# Altium PCB ESC.PcbDoc
Units mil, origin at the board's own origin, x right, y up, seen from the top; angles counter-clockwise.
Board outline 1770 x 2190 mil, 2 copper layers (Top Layer, Bottom Layer); 93 components, 68 nets, 363 pads, 118 vias.
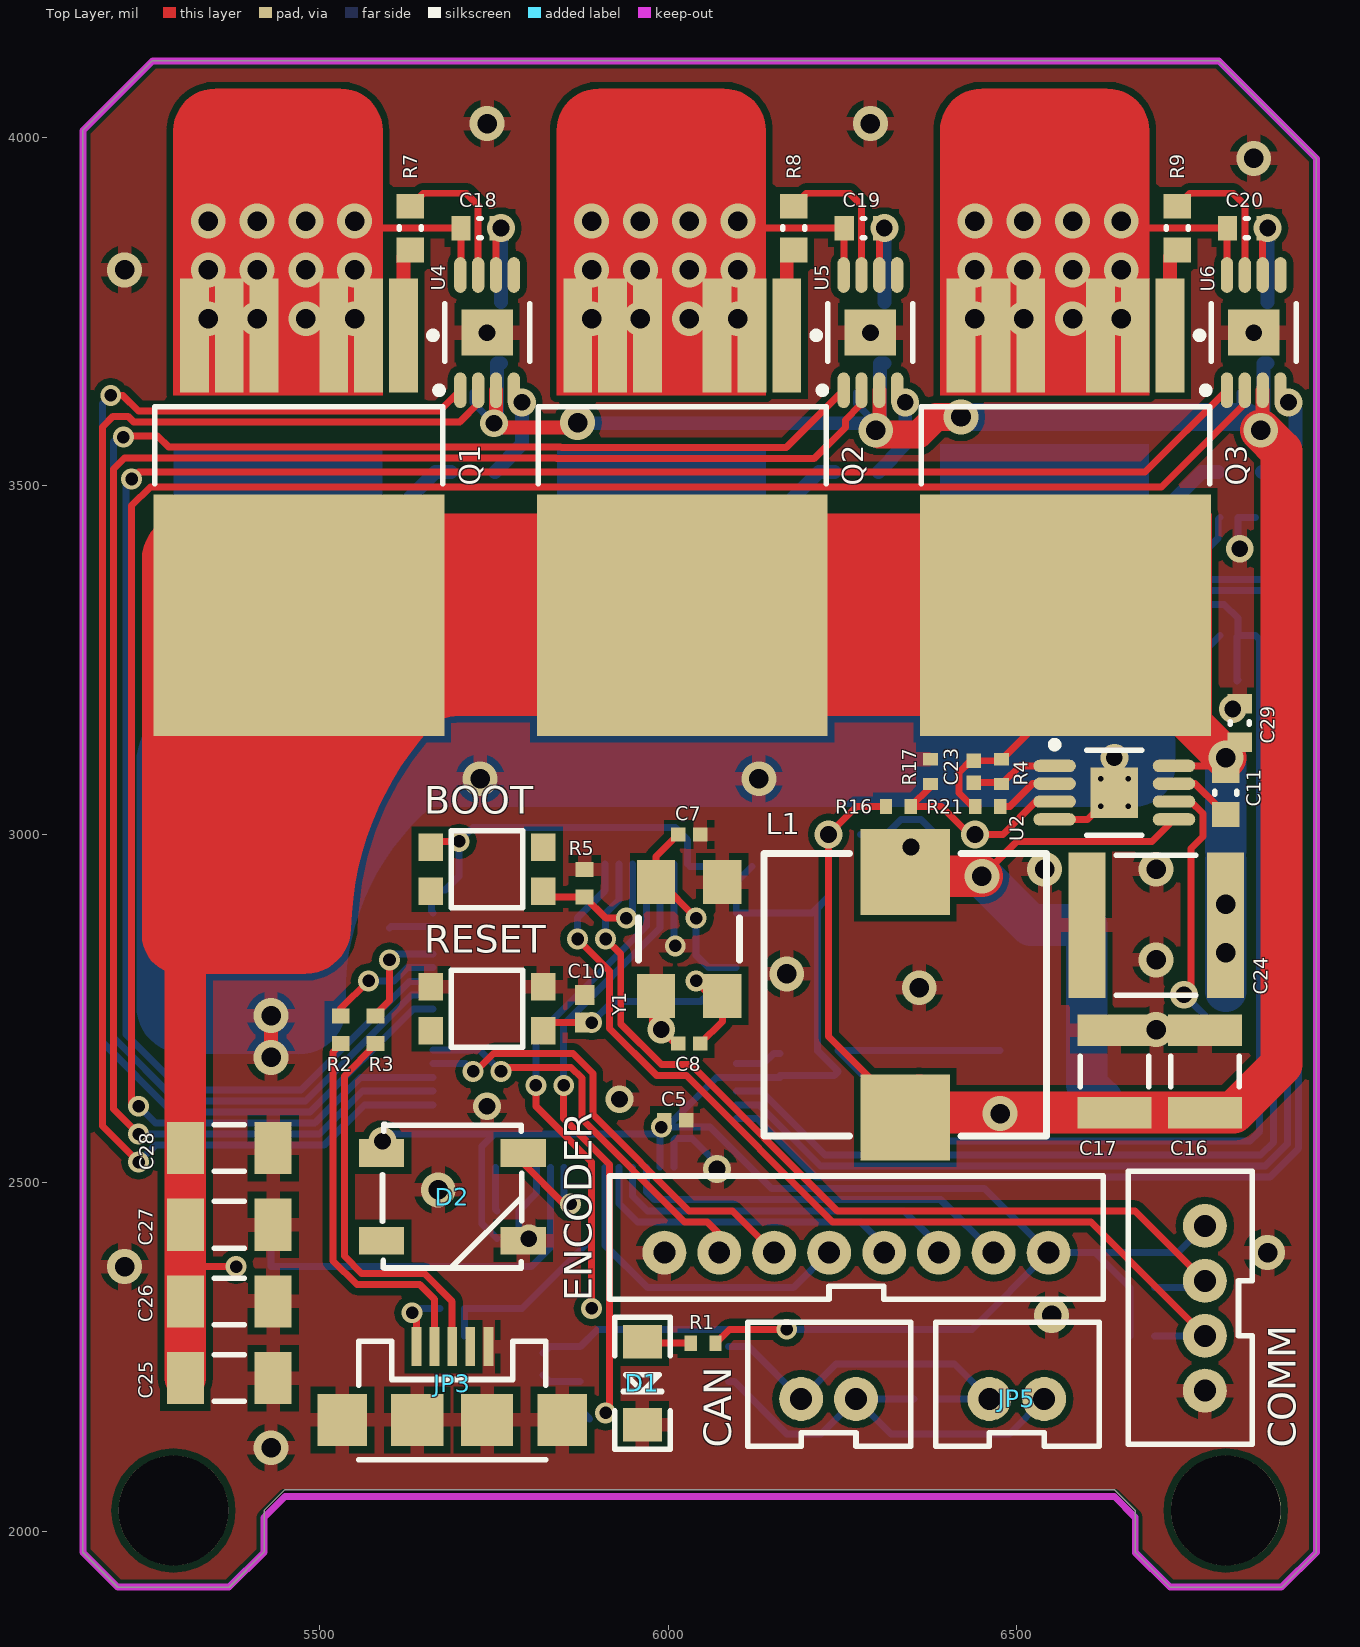
[diagram p0: Top Layer view]
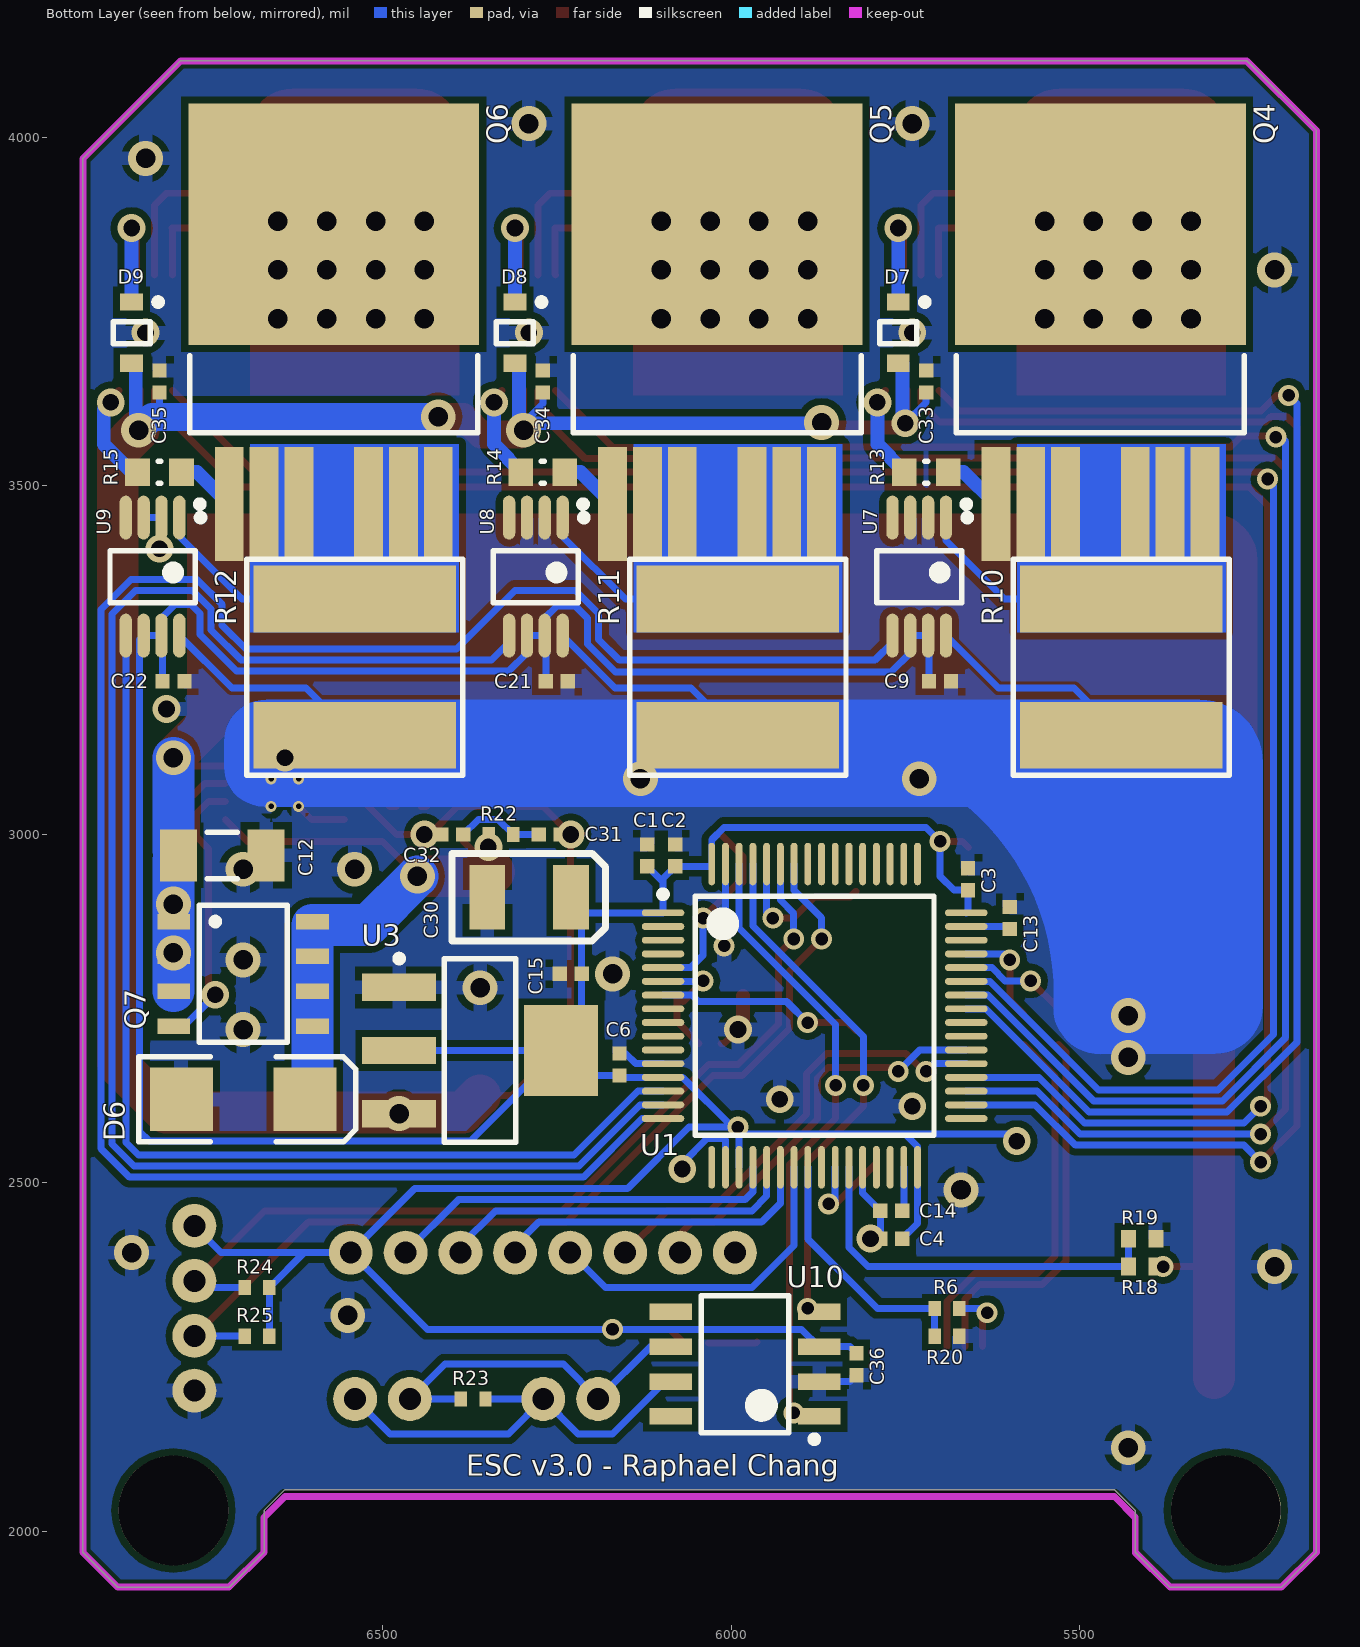
[diagram p1: Bottom Layer view, seen from below]

## Layer stack, top to bottom
Top Solder: solder mask 0.4, Solder Resist, Dk 3.5
Top Layer: signal copper 1.4
Dielectric 1: dielectric 12.6, FR-4, Dk 4.8
Bottom Layer: signal copper 1.4
Bottom Solder: solder mask 0.4, Solder Resist, Dk 3.5

## Board outline
5160,1970 5210,1920 5370,1920 5420,1970 5420,2030 5450,2060 6640,2060 6670,2030 6670,1970 6720,1920 6880,1920 6930,1970 6930,3970 6790,4110 5260,4110 5160,4010

## Design rules (kind name [scope] priority, off if disabled: settings)
Clearance Clearance_2 [All vs OnLayer('Keep-Out Layer')] p1: gap=5.91
Clearance Clearance_1 [InPolygon] p2: gap=9.84
Clearance [All] p3: gap=5.91
ComponentClearance [All] p1: gap=10 collisioncheckmode=3 verticalgap=0 showdistances=FALSE
PolygonConnect [All] p1: connectstyle=Relief reliefconductorwidth=20 reliefentries=4 polygonreliefangle="90 Angle" airgapwidth=10
RoutingVias [All] p1: holewidth=28 width=50 viastyle="Through Hole" minholewidth=24 minwidth=40 maxholewidth=28 maxwidth=50
ShortCircuit ShortCircuit_1 [All vs OnLayer('Keep-Out Layer')] p1: allowed=TRUE
ShortCircuit [All] p2: allowed=FALSE
SolderMaskExpansion [All] p1: expansion=4
Width [All] p1: maxlimit=60 minlimit=10 preferedwidth=10
28 further rules are at their usual default settings.

## Classes and differential pairs
component class U_Power: C11 C12 C15 C16 C17 C18 C19 C20 C23 C24 C25 C26 C27 C28 C29 C30 C31 C32 C33 C34 C35 D6 D7 D8 D9 L1 Q1 Q2 Q3 Q4 Q5 Q6 Q7 R4 R7 R8 R9 R10 R11 R12 R13 R14 R15 R16 R17 R21 R22 U2 U3 U4 U5 U6
component class U_MCU: BOOT C1 C2 C3 C4 C5 C6 C7 C8 C9 C10 C13 C14 C21 C22 C36 D1 D2 R1 R2 R3 R5 R6 R18 R19 R20 R23 R24 R25 RESET U1 U7 U8 U9 U10 Y1
component class ESC: CAN JP1 JP2 JP3 JP5

## Components (designator, comment, footprint, x,y, rotation, side; value= is the part's Value field where it differs from the comment)
BOOT "" SWITCH 5740,2950 r180 top (schematic designator SW1)
C1 "2.2uF" CAPC0402(1005)60_L 6120,2970 r270 bottom
C2 "2.2uF" CAPC0402(1005)60_L 6080,2970 r270 bottom
C3 "2.2uF" CAPC0402(1005)60_L 5660,2935.75 r270 bottom
C4 "2.2uF" CAPC0402(1005)60_L 5770,2420 r180 bottom
C5 "2.2uF" CAPC0402(1005)60_L 6010,2590 r180 top
C6 "4.7uF" CAPC0402(1005)60_L 6160,2670 r270 bottom
C7 "15pF" CAPC0402(1005)60_L 6030,3000 r0 top
C8 "15pF" CAPC0402(1005)60_L 6030,2700 r180 top
C9 "0.1uF" CAPC0402(1005)60_L 5700,3220 r180 bottom
C10 "100nF" CAPC0402(1005)60_M 5880,2750 r270 top
C11 "0.47uF" CAPC0603(1608)100_N 6800,3060 r90 top
C12 "10uF" CAPC1206(3216)190_M 6730,2970 r0 bottom
C13 "2.2uF" CAPC0402(1005)60_L 5600,2880 r270 bottom
C14 "2.2uF" CAPC0402(1005)60_L 5770,2460 r180 bottom
C15 "10uF" CAPC0402(1005)60_L 6230,2800 r180 bottom
C16 "47uF" CAPC1210(3225)280_N 6770,2660 r270 top
C17 "47uF" CAPC1210(3225)280_N 6640,2660 r270 top
C18 "0.22uF" CAPC0603(1608)100_L 5730,3870 r0 top
C19 "0.22uF" CAPC0603(1608)100_L 6280,3870 r0 top
C20 "0.22uF" CAPC0603(1608)100_L 6830,3870 r0 top
C21 "0.1uF" CAPC0402(1005)60_L 6250,3220 r180 bottom
C22 "0.1uF" CAPC0402(1005)60_L 6800,3220 r180 bottom
C23 "1nF" CAPC0402(1005)60_L 6438.36,3090 r270 top
C24 "22uF" CAPC2220(5750)230_L 6700,2870 r0 top
C25 "10uF" CAPC1206(3216)190_M 5370,2220 r180 top
C26 "10uF" CAPC1206(3216)190_M 5370,2330 r180 top
C27 "10uF" CAPC1206(3216)190_M 5370,2440 r180 top
C28 "10uF" CAPC1206(3216)190_M 5370,2550 r180 top
C29 "1uF" CAPC0603(1608)100_L 6820,3160 r270 top
C30 "100uF" AVX-CAPC7343_V 6290,2910 r0 bottom
C31 "10nF" CAPC0402(1005)60_L 6260,3000 r180 bottom
C32 "0.1uF" CAPC0402(1005)60_L 6400,3000 r180 bottom
C33 "1uF" CAPC0402(1005)60_L 5720,3650 r270 bottom
C34 "1uF" CAPC0402(1005)60_L 6270,3650 r270 bottom
C35 "1uF" CAPC0402(1005)60_L 6820,3650 r270 bottom
C36 "0.1uF" CAPC0402(1005)60_L 5820,2240 r90 bottom
CAN "" JST-2-PTH-VERT 6230,2190 r0 top (schematic designator JP4)
COMM "" JST-4-PTH-VERT 6770,2320 r90 top (schematic designator JP1)
D1 "LED-BLUE" LED-1206 5962.8,2212.8 r270 top
D2 "WS2812B" WS2812B 5690,2480 r0 top
D6 "" SMB 6700,2620 r180 bottom
D7 "" ONSC-SOD-323-2-477-02_V 5760,3720 r270 bottom
D8 "" ONSC-SOD-323-2-477-02_V 6310,3720 r270 bottom
D9 "" ONSC-SOD-323-2-477-02_V 6860,3720 r270 bottom
ENCODER "Encoder" JST-8-PTH-VERT 6270,2400 r0 top (schematic designator JP2)
JP3 "USB" USB-MICROB 5690,2160 r0 top
JP5 "" JST-2-PTH-VERT 6500,2190 r0 top
L1 "SDR0805-180ML" IHLP-4040DZ-51 6340,2770 r270 top
Q1 "IRFS7530" DPAK127P1525X483-7N 5470,3470 r270 top
Q2 "IRFS7530" DPAK127P1525X483-7N 6020,3470 r270 top
Q3 "IRFS7530" DPAK127P1525X483-7N 6570,3470 r270 top
Q4 "IRFS7530" DPAK127P1525X483-7N 5470,3720 r90 bottom
Q5 "IRFS7530" DPAK127P1525X483-7N 6020,3720 r90 bottom
Q6 "IRFS7530" DPAK127P1525X483-7N 6570,3720 r90 bottom
Q7 "MOSFET-P" SOIC127P600X175-8N 6700,2800 r180 bottom
R1 "10R" RESC0402(1005)_L 6050,2270 r0 top
R2 "22R" RESC0402(1005)_M 5530,2720 r90 top
R3 "22R" RESC0402(1005)_M 5580,2720 r90 top
R4 "10K" RESC0402(1005)_L 6478.36,3090 r90 top
R5 "10K" RESC0402(1005)_N 5880,2930 r270 top
R6 "4K7" RESC0402(1005)_L 5690,2320 r180 bottom
R7 "4R7" RESC0603(1608)_N 5630,3870 r90 top
R8 "4R7" RESC0603(1608)_N 6180,3870 r90 top
R9 "4R7" RESC0603(1608)_N 6730,3870 r90 top
R10 "" Shunt 5440,3240 r90 bottom
R11 "" Shunt 5990,3240 r90 bottom
R12 "" Shunt 6540,3240 r90 bottom
R13 "4R7" RESC0603(1608)_N 5720,3520 r0 bottom
R14 "4R7" RESC0603(1608)_N 6270,3520 r0 bottom
R15 "4R7" RESC0603(1608)_N 6820,3520 r0 bottom
R16 "36K" RESC0402(1005)_L 6330,3040 r180 top
R17 "3K9" RESC0402(1005)_L 6376.07,3090 r270 top
R18 "200K" RESC0402(1005)_N 5410,2380 r0 bottom
R19 "10K" RESC0402(1005)_N 5410,2420 r0 bottom
R20 "9K1" RESC0402(1005)_L 5690,2280 r0 bottom
R21 "200K" RESC0402(1005)_L 6458.36,3040 r0 top
R22 "154K" RESC0402(1005)_L 6330,3000 r180 bottom
R23 "120R" RESC0402(1005)_L 6370,2190 r180 bottom
R24 "4K7" RESC0402(1005)_L 6680,2280 r180 bottom
R25 "4K7" RESC0402(1005)_L 6680,2350 r180 bottom
RESET "" SWITCH 5740,2750 r180 top (schematic designator SW2)
U1 "STM32F405RGT7TR" STM-LQFP64_L 5880,2740 r180 bottom
U2 "LM5085QMY/NOPB" MUY08A_N 6640,3060 r0 top
U3 "LD1117AS33TR" SOT-223_M 6360,2690 r180 bottom
U4 "LTC4444" LT-MS8E-8-EDP_L 5740,3720 r90 top
U5 "LTC4444" LT-MS8E-8-EDP_L 6290,3720 r90 top
U6 "LTC4444" LT-MS8E-8-EDP_L 6840,3720 r90 top
U7 "AD8418" MSOP-8 5730,3370 r270 bottom
U8 "AD8418" MSOP-8 6280,3370 r270 bottom
U9 "AD8418" MSOP-8 6830,3370 r270 bottom
U10 "TCAN332" SOIC8 5980,2240 r0 bottom
Y1 "" ABRA-ABM3B-4_V 6030,2850 r270 top

## Footprints (in the part's own frame and the unit in brackets; to place one, negate y for a bottom-side part, rotate by r counter-clockwise, add the part's x,y. Pads: shape width x height; smd on the part's side, far side on the other; paste and mask are expansions set on the pad)
ABRA-ABM3B-4_V [mil] "SMT Crystal, 4-Leads, Body 5.2x3.4mm"
  rect 63x55 smd: 1(-81.5,-47.5) 2(-81.5,47.5) 2(81.5,-47.5) 3(81.5,47.5)
  silkscreen extent -31,-72 31,72, body extent -114,-52 113,51, height 39
AVX-CAPC7343_V [mm] "SMT Capacitor, 2 Leads, Body 7.3x4.3mm"
  rect 1.3x2.35 smd: 1(-1.535,0.001) 2(1.515,0.001)
  silkscreen extent -2.8,-1.6 2.8,1.6, body extent -2.1,-1.1 2.1,1.1, height 1.9
CAPC0402(1005)60_L [mm] "Chip Capacitor, Body 1.0x0.5mm, Height 0.6mm, IPC High Density"
  rect 0.52x0.52 smd: 1(-0.4,0) 2(0.4,0)
  body extent -0.55,-0.3 0.55,0.3, height 0.6
CAPC0402(1005)60_M [mm] "Chip Capacitor, Body 1.0x0.5mm, Height 0.6mm, IPC Low Density"
  rect 0.72x0.72 smd: 1(-0.5,0) 2(0.5,0)
  body extent -0.55,-0.3 0.55,0.3, height 0.6
CAPC0603(1608)100_L [mm] "Chip Capacitor, Body 1.6x0.8mm, Height 1.0mm, IPC High Density"
  rect 0.7x0.9 smd: 1(-0.7,0) 2(0.7,0)
  silkscreen extent -0.05,-0.35 0.05,0.35, body extent -0.87,-0.47 0.88,0.48, height 1
CAPC0603(1608)100_N [mm] "Chip Capacitor, Body 1.6x0.8mm, Height 1.0mm, IPC Medium Density"
  rect 0.9x1 smd: 1(-0.8,0) 2(0.8,0)
  silkscreen extent -0.05,-0.4 0.05,0.4, body extent -0.87,-0.48 0.88,0.47, height 1
CAPC1206(3216)190_M [mm] "Chip Capacitor, Body 3.2x1.6mm, Height 1.9mm, IPC Low Density"
  rect 1.35x1.9 smd: 1(-1.6,0) 2(1.6,0)
  silkscreen extent -0.55,-0.85 0.55,0.85, body extent -1.7,-0.9 1.7,0.9, height 1.9
CAPC1210(3225)280_N [mm] "Chip Capacitor, Body 3.2x2.5mm, Height 2.8mm, IPC Medium Density"
  rect 1.15x2.7 smd: 1(-1.5,0) 2(1.5,0)
  silkscreen extent -0.55,-1.25 0.55,1.25, body extent -1.7,-1.4 1.7,1.4, height 2.8
CAPC2220(5750)230_L [mm] "Chip Capacitor, Body 5.7x5.0mm, Height 2.3mm, IPC High Density"
  rect 1.35x5.3 smd: 1(-2.525,0) 2(2.525,0)
  silkscreen extent -1.45,-2.55 1.45,2.55, body extent -3.05,-2.7 3.05,2.7, height 2.3
DPAK127P1525X483-7N [mm] "D2-PAK, 7-Pads, Body 7.93x8.63mm (max), IPC Medium Density"
  rect 4.15x1.05 smd mask+0.051: 1(-6.25,3.81) 2(-6.25,2.54) 2(-6.25,-1.27) 2(-6.25,1.27) 2(-6.25,-3.81) 2(-6.25,-2.54)
  rect 8.8x10.6 smd: 8(3.95,0)
  silkscreen extent -6.37,-5.25 -0.85,5.25, body extent -7,-5 8,5, height 4.2
IHLP-4040DZ-51 [mil]
  rect 123x128 smd: 1(-176,0) 2(176,0)
  silkscreen extent -203,-203 203,203, body extent -200,-200 200,200, height 157
JST-2-PTH-VERT [mil]
  round 63 hole 31.5: 1(-39.37,0) 2(39.37,0)
  silkscreen extent -116,-68 118,110, body extent -114,-64 118,113, height 236
JST-4-PTH-VERT [mil]
  round 63 hole 31.5: 1(-118.11,0) 2(-39.37,0) 3(39.37,0) 4(118.37,0)
  silkscreen extent -195,-68 197,110, body extent -195,-67 195,110, height 236
JST-8-PTH-VERT [mil]
  round 63 hole 31.5: 1(-275.59,0) 2(-196.85,0) 3(-118.11,0) 4(-39.11,0) 5(39.89,0) 6(118.11,0) 7(196.85,0) 8(275.59,0)
  silkscreen extent -354,-67 354,110, body extent -352,-67 352,110, height 236
LED-1206 [mil]
  rect 48x56 smd: A(-59.06,0) C(60,0)
  silkscreen extent -94,-39 95,40, body extent -63,-31 63,31, height 43
LT-MS8E-8-EDP_L [mm] "SOP, 8-Leads, Body 3.1x3.1mm, Pitch 0.65mm, Thermal Pad 1.88x1.68mm, IPC High Density"
  oval 1.3x0.45 smd: 1(-2.1,0.975) 2(-2.1,0.325) 3(-2.1,-0.325) 4(-2.1,-0.975) 5(2.1,-0.975) 6(2.1,-0.325) 7(2.1,0.325) 8(2.1,0.975)
  rect 1.68x1.88 smd: 9(0,0)
  silkscreen extent -2.22,-1.55 1.05,1.87, body extent -1.55,-1.55 1.55,1.55, height 1.1
MSOP-8 [mm] "SOP, 8-Leads, Body 3x3mm, Pitch 0.65mm, IPC Medium Density"
  oval 1.6x0.45 smd: 1(-2.15,0.975) 2(-2.15,0.325) 3(-2.15,-0.325) 4(-2.15,-0.975) 5(2.15,-0.975) 6(2.15,-0.325) 7(2.15,0.325) 8(2.15,0.975)
  silkscreen extent -2.27,-1.55 0.95,1.87, body extent -1.55,-1.55 1.55,1.55, height 0.05
MUY08A_N [mm] "TSOP, 8-Leads, Body 3x3mm, Pitch 0.65mm, Thermal Pad, IPC Medium Density"
  oval 1.55x0.45 smd: 1(-2.175,0.975) 2(-2.175,0.325) 3(-2.175,-0.325) 4(-2.175,-0.975) 5(2.175,-0.975) 6(2.175,-0.325) 7(2.175,0.325) 8(2.175,0.975)
  rect 1.73x1.85 smd: 9(0,0)
  silkscreen extent -2.3,-1.55 1,1.87, body extent -1.55,-1.55 1.55,1.55, height 1.09
ONSC-SOD-323-2-477-02_V [mm] "SOD, 2-Leads, Body 1.7x1.25mm"
  rect 0.63x0.83 smd: 1(-1.115,0) 2(1.115,0)
  silkscreen extent -1.24,-0.67 0.4,1.09, body extent -0.85,-0.63 0.85,0.63, height 1.06
RESC0402(1005)_L [mm] "Chip Resistor, Body 1.0x0.5mm, IPC High Density"
  rect 0.45x0.55 smd: 1(-0.45,0) 2(0.45,0)
  body extent -0.52,-0.27 0.53,0.28, height 0.4
RESC0402(1005)_M [mm] "Chip Resistor, Body 1.0x0.5mm, IPC Medium Density"
  rect 0.55x0.65 smd: 1(-0.5,0) 2(0.5,0)
  body extent -0.52,-0.27 0.53,0.28, height 0.4
RESC0402(1005)_N [mm] "Chip Resistor, Body 1.0x0.5mm, IPC Medium Density"
  rect 0.55x0.65 smd: 1(-0.5,0) 2(0.5,0)
  body extent -0.52,-0.27 0.53,0.28, height 0.4
RESC0603(1608)_N [mm] "Chip Resistor, Body 1.6x0.8mm, IPC Medium Density"
  rect 0.9x1 smd: 1(-0.8,0) 2(0.8,0)
  silkscreen extent -0.05,-0.4 0.05,0.4, body extent -0.85,-0.47 0.85,0.47, height 0.6
Shunt [mm]
  rect 2.44x7.38 smd: 1(-2.48,0) 2(2.48,0)
  silkscreen extent -3.94,-3.94 3.94,3.94
SMB [mm] "DO-214-AA/SMB; 2 C-Bend Leads; Body 5.3 x 3.6 mm, inc. leads (LxW)"
  rect 2.3x2.3 smd: 1(-2.25,0) 2(2.25,0)
  silkscreen extent -3.8,-1.55 4.1,1.55
SOIC8 [mm] "SOIC, 8-Leads, Body 4.90x3.90mm, Pitch 1.27mm, IPC Medium Density"
  rect 1.55x0.6 smd: 1(-2.7,1.905) 2(-2.7,0.635) 3(-2.7,-0.635) 4(-2.7,-1.905) 5(2.7,-1.905) 6(2.7,-0.635) 7(2.7,0.635) 8(2.7,1.905)
  silkscreen extent -2.65,-2.5 1.6,2.86, body extent -2,-2.5 2,2.5, height 1.75
SOIC127P600X175-8N [mm] "SOIC, 8-Leads, Body 4.90x3.90mm, Pitch 1.27mm, IPC Medium Density"
  rect 1.194x0.56 smd: 1(-2.528,-0.635) 1(-2.528,0.635) 1(-2.528,1.905) 2(-2.528,-1.905) 3(2.527,-1.905) 3(2.527,-0.635) 3(2.527,0.635) 3(2.527,1.905)
  silkscreen extent -1.6,-2.5 1.6,2.5
SOT-223_M [mm] "SOT223, 4-Leads, Body 6.5x3.5mm, Pitch 2.3mm, Lead Span 7mm, IPC Low Density"
  rect 2.7x1 smd: 1(-2.95,2.3) 2(-2.95,0) 3(-2.95,-2.3)
  rect 2.7x3.3 smd: 4(2.95,0)
  silkscreen extent -3.08,-3.35 1.3,3.47, body extent -1.85,-3.35 1.85,3.35, height 1.8
STM-LQFP64_L [mm] "Thin QFP, 64-Leads, Body 10x10mm, Pitch 0.5mm, IPC High Density"
  oval 1.55x0.25 smd: 1(-5.525,3.75) 2(-5.525,3.25) 3(-5.525,2.75) 4(-5.525,2.25) 5(-5.525,1.75) 6(-5.525,1.25) 7(-5.525,0.75) 8(-5.525,0.25) 9(-5.525,-0.25) 10(-5.525,-0.75) 11(-5.525,-1.25) 12(-5.525,-1.75) 13(-5.525,-2.25) 14(-5.525,-2.75) 15(-5.525,-3.25) 16(-5.525,-3.75) 33(5.525,-3.75) 34(5.525,-3.25) 35(5.525,-2.75) 36(5.525,-2.25) 37(5.525,-1.75) 38(5.525,-1.25) 39(5.525,-0.75) 40(5.525,-0.25) 41(5.525,0.25) 42(5.525,0.75) 43(5.525,1.25) 44(5.525,1.75) 45(5.525,2.25) 46(5.525,2.75) 47(5.525,3.25) 48(5.525,3.75)
  oval 0.25x1.55 smd: 17(-3.75,-5.525) 18(-3.25,-5.525) 19(-2.75,-5.525) 20(-2.25,-5.525) 21(-1.75,-5.525) 22(-1.25,-5.525) 23(-0.75,-5.525) 24(-0.25,-5.525) 25(0.25,-5.525) 26(0.75,-5.525) 27(1.25,-5.525) 28(1.75,-5.525) 29(2.25,-5.525) 30(2.75,-5.525) 31(3.25,-5.525) 32(3.75,-5.525) 49(3.75,5.525) 50(3.25,5.525) 51(2.75,5.525) 52(2.25,5.525) 53(1.75,5.525) 54(1.25,5.525) 55(0.75,5.525) 56(0.25,5.525) 57(-0.25,5.525) 58(-0.75,5.525) 59(-1.25,5.525) 60(-1.75,5.525) 61(-2.25,5.525) 62(-2.75,5.525) 63(-3.25,5.525) 64(-3.75,5.525)
  silkscreen extent -5.65,-4.35 4.35,4.55, body extent -5,-5 5,5, height 1.6
SWITCH [mm]
  rect 0.9x1 smd: 1(-2.05,0.8) 2(2.05,0.8) 3(-2.05,-0.8) 4(2.05,-0.8)
  silkscreen extent -1.3,-1.4 1.3,1.4, body extent -2.3,-1.4 2.3,1.4, height 1.9
USB-MICROB [mil]
  rect 14x56 smd: D+(0,105) D-(-25.59,105) GND(52,105) ID(26,105) VBUS(-51.18,105)
  rect 71x75 smd: MT1(-157.48,0) MT2(158,0)
  rect 75x75 smd: P$1(-50,0) P$2(50,0)
  silkscreen extent -134,-57 134,113, body extent -156,-80 157,134, height 112
WS2812B [mil]
  rect 65x40 smd: 1(-101.46,63) 2(-101.46,-62.99) 3(102,-62.99) 4(102,63)
  silkscreen extent -100,-102 100,104, body extent -105,-97 105,97, height 67

## Part data
BOOT RESET: library part DIPT-DTSM-6, "Switch, SPNO Push Button SMD"
C1 C2 C3 C4 C5 C13 C14: library part CMP-1034-02125-1, "CAP 2.2uF 6.3V ±10% 0402 (1005 Metric) Thickness 0.6mm SMD"
C6: library part CMP-1034-02136-1, "CAP 4.7uF 6.3V ±10% 0402 (1005 Metric) Thickness 0.6mm SMD"
C7 C8: library part CMP-1034-01906-1, "CAP 15nF 6.3V ±10% 0402 (1005 Metric) Thickness 0.6mm SMD"
C9 C10 C21 C22 C36: library part CMP-1034-02060-1, "CAP 100nF 6.3V ±5% 0402 (1005 Metric) Thickness 0.6mm SMD"
C11: library part CMP-1035-02708-1, "CAP 470nF 50V ±10% 0603 (1608 Metric) Thickness 1mm SMD"
C12 C25 C26 C27 C28: library part CMP-1037-04982-1, "CAP 10uF 50V ±10% 1206 (3216 Metric) Thickness 1.9mm SMD"
C15: library part CMP-1034-02138-1, "CAP 10uF 6.3V ±20% 0402 (1005 Metric) Thickness 0.6mm SMD"
C16 C17: library part CMP-1038-02295-1, "CAP 47uF 16V ±10% 1210 (3225 Metric) Thickness 2.8mm SMD"
C18 C19 C20: library part CMP-1035-02736-1, "CAP 1uF 16V ±5% 0603 (1608 Metric) Thickness 1mm SMD"
C23: library part CMP-1034-01624-1, "CAP 1nF 50V ±1% 0402 (1005 Metric) Thickness 0.6mm SMD"
C24: library part CMP-1042-00782-1, "CAP 22uF 50V -20% to +80% 2220 (5750 Metric) Thickness 2.2mm SMD"
C29: library part CMP-1035-02745-1, "CAP 1uF 50V ±10% 0603 (1608 Metric) Thickness 1mm SMD"
C30: library part AVX-CAP-P-2
C31: library part CMP-1034-01885-1, "CAP 10nF 50V ±5% 0402 (1005 Metric) Thickness 0.6mm SMD"
C32: library part CMP-1034-02077-1, "CAP 100nF 50V ±10% 0402 (1005 Metric) Thickness 0.6mm SMD"
C33 C34 C35: library part CMP-1034-02119-1, "CAP 1uF 16V ±10% 0402 (1005 Metric) Thickness 0.6mm SMD"
CAN JP5: library part JST_2_VERT
COMM: library part JST_4_VERT
D1: library part LED-BLUE1206
D6: library part "D Schottky", "Schottky Diode"
D7 D8 D9: library part CMP-1051-00017-1, "Silicon Hot-Carrier Diode, Schottky Barrier Diode, 2-Pin SOD-323, Pb-Free, Tape and Reel"
ENCODER: library part JST_8_VERT
JP3: library part USB_MICROB_PLUG-SMT
L1: "Inductor"
Q1 Q2 Q3 Q4 Q5 Q6: "N-Channel MOSFET"
Q7: "P-Channel MOSFET"
R1: library part CMP-1011-00026-1, "10R 0.063W 5% 0402 (1005 Metric)  SMD"
R2 R3: library part CMP-1011-00034-1, "22R 0.063W 5% 0402 (1005 Metric)  SMD"
R4: library part CMP-1011-00623-1, "10K 0.063W 1% 0402 (1005 Metric)  SMD"
R5 R19: library part CMP-1011-00098-1, "10K 0.063W 5% 0402 (1005 Metric)  SMD"
R6 R24 R25: library part CMP-1011-00090-1, "4K7 0.063W 5% 0402 (1005 Metric)  SMD"
R7 R8 R9 R13 R14 R15: library part CMP-1012-00018-1, "4R7 0.1W 5% 0603 (1608 Metric)  SMD"
R10 R11: library part Shunt, "0.001R"
R12: library part Shunt, "Resistor"
R16: library part CMP-1011-00685-1, "36K 0.063W 1% 0402 (1005 Metric)  SMD"
R17: library part CMP-1011-00576-1, "3K9 0.063W 1% 0402 (1005 Metric)  SMD"
R18: library part CMP-1011-00091-1, "5K1 0.063W 5% 0402 (1005 Metric)  SMD"
R20: library part CMP-1011-00097-1, "9K1 0.063W 5% 0402 (1005 Metric)  SMD"
R21: library part CMP-1011-00768-1, "200K 0.063W 1% 0402 (1005 Metric)  SMD"
R22: library part CMP-1011-00755-1, "154K 0.063W 1% 0402 (1005 Metric)  SMD"
R23: library part CMP-1011-00052-1, "120R 0.063W 5% 0402 (1005 Metric)  SMD"
U1: library part CMP-0243-00089-2, "ARM Cortex-M4 32-bit MCU+FPU, 210 DMIPS, 1024 kB Flash, 192 kB Internal RAM, 51 I/Os, 64-pin LQFP, -40 to 105 degC, Tape and Reel"
U2: library part CMP-0069-01314-2, "75V Constant On-Time PFET Buck Switching Controller, 8-pin eMSOP, Pb-Free"
U3: library part CMP-0244-00316-1, "1A, Low Drop Positive Voltage Regulator, 3.3V, 4-Pin SOT-223, Tape and Reel"
U4 U5 U6: library part LT-LTC444X-MS8E-8
Y1: library part ABRA-ABM3B-4

## Free pads (board coordinates)
  round 157.48 hole 157.48: 0(5290,2030) 1(6800,2030)

## Via types
v1: diameter 50, hole 28, Top Layer to Bottom Layer, 64 vias
v2: diameter 30, hole 18, Top Layer to Bottom Layer, 27 vias
v3: diameter 40, hole 24, Top Layer to Bottom Layer, 23 vias
v4: diameter 15.75, hole 7.87, Top Layer to Bottom Layer, 4 vias

## Nets (pads, with @x,y where several pads share a name; then routed paths per layer and width w, separated by ;. In a path a pad name is that pad's centre, name@x,y a point inside that pad or via, vN(x,y) a via of type N, cw(c..) or ccw(c..) an arc to the next point about the centre after c; other vN are vias at no path point)
12V: C16.2 C17.2 C31.2 C33.2 C34.2 C35.2 D7.2 D8.2 D9.2 L1.2 R16.2 U3.3 U4.3 U5.3 U6.3 | length 3812.2
  Top Layer w10: R16.2 6270,3040 v3(6230,3000) 6230,2710 6314.33,2625.67 L1.2@6360,2625.67
  Top Layer w20: U4.3 5752.8,3592.8 v3(5750,3590) 5755.91,3584.09 5863.19,3584.09 v1(5870,3590.91) ; v1(6297.58,3580) 6302.8,3585.21 U5.3 ; v1(6850,3580) 6852.8,3582.8 U6.3
  Top Layer w40: v1@6301.94,3574.09 6359.01,3574.09 6384.01,3599.09 v1(6420,3599.09)
  Top Layer w60: L1.2@6360,2625.67 6384.72,2600.94 C17.2 C16.2 6810.94,2600.94 6880,2670 6880,3550 v1(6850,3580)
  Bottom Layer w10: C33.2 5720,3620 v3(5750,3590) ; C34.2 6270,3618.01 6298.01,3590 6304.09,3583.91 6300.18,3580 v1(6297.58,3580) ; C35.2 6820,3610 v1(6850,3580)
  Bottom Layer w20: v3(5750,3590) 5754.09,3594.09 5754.09,3676.1 D7.2 ; v1@5870,3590 v1@6298.01,3590 ; v1@6304.09,3583.91 6304.09,3676.1 D8.2 ; v1(6850,3580) 6854.09,3584.09 6854.09,3676.1 D9.2
  Bottom Layer w40: v1(6420,3599.09) 6830.58,3599.09 v1@6849.68,3580
  other v1: 6476.14,2599.45
C1: U1.16 U7.5 | length 2962.7
  Bottom Layer w10: U7.5 5768.39,3275.35 5793.74,3250 6160,3250 6190,3280 6190,3316.82 6223.18,3350 6310,3350 6393.89,3266.11 6696.11,3266.11 6730,3300 6730,3330 6765.91,3365.91 6860.92,3365.91 6904.06,3322.77 6904.06,2549.07 6863.18,2508.19 6211.81,2508.19 6127.64,2592.36 U1.16
C2: U1.15 U8.5 | length 2263.8
  Bottom Layer w10: U1.15 6130.45,2612.05 6218.4,2524.09 6856.59,2524.09 6888.15,2555.66 6888.15,3316.18 6854.33,3350 6772.49,3350 6745.91,3323.41 6745.91,3293.41 6702.7,3250.21 6343.53,3250.21 6318.39,3275.35 U8.5
C3: U1.14 U9.5 | length 1533.6
  Bottom Layer w10: U1.14 6133.26,2631.73 6224.99,2540 6850,2540 6868.19,2558.19 U9.5@6868.19,3275.55
CAN_RX: U1.61 U10.4 | length 736.3
  Top Layer w10: v2(5810,2640) 5810,2610 5890,2530 v2(5890,2320)
  Bottom Layer w10: v2(5810,2640) 5810,2710 5968.58,2868.58 U1.61
CAN_TX: U1.62 U10.1 | length 885.7
  Top Layer w10: v2(5850,2640) 5850,2592.49 5915.91,2526.59 5915.91,2175.91 v2(5910,2170)
  Bottom Layer w10: v2(5850,2640) 5850,2727.51 5988.27,2865.77 U1.62 ; U10.1@5878.86,2169.5 U10.1@5886.74,2161.61
CANH: CAN.2 JP5.2 R23.2 U10.7 | length 629.2
  Bottom Layer w10: U10.7 6095,2215 6170,2140 6219.37,2140 CAN.2 ; R23.2 CAN.2 ; JP5.2 6489.37,2140 6319.37,2140 CAN.2
CANL: CAN.1 JP5.1 R23.1 U10.6 | length 519.7
  Bottom Layer w10: U10.6 6115.63,2265 CAN.1 6240.63,2240 6410.63,2240 JP5.1 R23.1
CLK: ENCODER.6 U1.21 | length 510
  Bottom Layer w10: U1.21 5948.9,2481.1 5970,2460 6338.11,2460 ENCODER.6@6388.11,2410
CS: ENCODER.7 U1.20 | length 569.6
  Bottom Layer w10: U1.20 5968.58,2487.32 5980,2475.91 6390.94,2475.91 ENCODER.7
GHA: R7.2 U4.7 | length 212.1
  Top Layer w10: R7.2 5648.5,3920 5710,3920 5727.2,3902.8 U4.7
GHB: R8.2 U5.7 | length 212.1
  Top Layer w10: R8.2 6198.5,3920 6260,3920 6277.2,3902.8 U5.7
GHC: R9.2 U6.7 | length 212.1
  Top Layer w10: R9.2 6748.5,3920 6810,3920 6827.2,3902.8 U6.7
GLA: R13.2 U4.4 | length 138.1
  Top Layer w10: U4.4 5790,3625.71 v3(5790,3620)
  Bottom Layer w20: R13.2 5771.5,3540 5771.5,3541.5 5790,3560 v3(5790,3620)
GLB: R14.2 U5.4 | length 138.1
  Top Layer w10: U5.4 6340,3625.71 v3(6340,3620)
  Bottom Layer w20: R14.2 6320,3538.5 6320,3540 6340,3560 v3(6340,3620)
GLC: R15.2 U6.4 | length 151.3
  Top Layer w10: U6.4 6890,3625.71 v3(6890,3620)
  Bottom Layer w20: R15.2 6860,3520 6900,3560 6900,3610 v3(6890,3620)
GND: C1.1 C2.1 C3.1 C4.1 C5.1 C6.1 C7.2 C8.2 C9.2 C10.1 C12.1 C13.1 C14.1 C15.1 C16.1 C17.1 C21.2 C22.2 C24.1 C25.1 C26.1 C27.1 C28.1 C29.1 C30.2 C33.1 C34.1 C35.1 C36.1 COMM.1 D1.C D2.3 D6.1 ENCODER.1 JP3.GND JP3.MT1 JP3.MT2 JP3.P$1 JP3.P$2 R5.1 R10.1 R11.1 R12.1 R17.1 R19.1 R20.1 RESET.3 RESET.4 U1.12 U1.18 U1.28 U1.63 U2.4 U2.9 U3.1 U4.9 U5.9 U6.9 U7.2 U7.3 U7.8 U8.2 U8.3 U8.8 U9.2 U9.3 U9.8 U10.2 Y1.2 | length 1753.8
  Top Layer w10: v3(5990,2720) 6010,2700 C8.2 ; U2.4 6601.61,3021.61 U2.9
  Top Layer w20: v1(5430,2680) v1(5430,2740) ; Y1.2@5982.5,2768.5 5982.5,2727.5 v3(5990,2720)
  Bottom Layer w10: R10.1 5507.64,3210 5616.26,3210 U7.8 ; v3(5800,2420) C4.1 C14.1 5811.1,2485.35 U1.28 ; C36.1 5829.25,2215 U10.2 ; R11.1 6057.64,3210 6166.26,3210 U8.8 ; U1.18 6007.95,2561.32 6010.53,2563.9 6034.19,2563.9 6070,2528.09 v3(6070,2520) ; U1.63 6007.95,2842.05 v2(6010,2840) ; U1.12 6136.66,2671.1 6151.31,2685.75 C6.1 ; R12.1@6540,3150 R12.1 6542.36,3142.36 6610,3210 6716.26,3210 U9.8 ; v3(6820,3410) 6817.2,3412.8 U9.2 U9.3
  other v1: 5430,2120 6550,2310 5220,2380 6860,2400 5670,2490 6700,2720 6360,2780 6170,2800 6700,2820 6540,2950 6700,2950 5730,3080 6130,3080 5220,3810 6840,3970 5740,4020 6290,4020
  other v3: 5740,2610 5930,2620 6640,3110 6810,3180 5740,3720 6290,3720 6840,3720
  other v4: 6620.31,3040.31 6659.69,3040.31 6620.31,3079.68 6659.69,3079.68
LED: D2.4 U1.26 | length 153.8
  Top Layer w10: D2.4@5792,2528 5850,2470 v2(5860,2470)
  Bottom Layer w10: U1.26 5850.47,2470.47 5850.94,2470 v2(5860,2470)
MISO: ENCODER.5 U1.22 | length 457.5
  Bottom Layer w10: U1.22@5929.29,2522.48 5929.29,2470.71 5955.91,2444.09 6275.8,2444.09 ENCODER.5@6309.89,2410
MOSI: ENCODER.4 U1.23 | length 488.6
  Bottom Layer w10: U1.23 5909.53,2410.47 5970,2350 6180,2350 6230.89,2400.89 ENCODER.4@6230.89,2410
NetC7_1: C7.1 U1.5 Y1.1 | length 278.7
  Top Layer w10: C7.1 5982.5,2968.25 Y1.1 5988.5,2931.5 v2(6040,2880)
  Bottom Layer w10: v2(6040,2880) 6040,2826.64 6057.74,2808.9 U1.5
NetC8_1: C8.1 U1.6 Y1.3 | length 193.5
  Top Layer w10: v2(6040,2790) 6040,2789 6069,2760 Y1.3 6077.5,2731.75 C8.1
  Bottom Layer w10: v2(6040,2790) 6040.79,2789.21 U1.6
NetC10_2: C10.2 RESET.1 U1.7 | length 288.1
  Top Layer w10: RESET.1 5832.52,2730.31 C10.2
  Bottom Layer w10: v2(5890,2730) 5920,2760 6046.64,2760 6056.16,2769.53 U1.7
NetC11_1: C11.1 U2.7 | length 88.6
  Top Layer w10: U2.7 6755.71,3072.8 6790,3038.5 C11.1@6800,3038.5
NetC13_2: C13.2 U1.47 | length 63.4
  Bottom Layer w10: C13.2@5600,2865.75 5602.2,2867.95 U1.47
NetC14_2: C14.2 U1.31 | length 63.4
  Bottom Layer w10: U1.31 5752.05,2462.2 C14.2
NetC18_2: C18.2 D7.1 U4.6 | length 176.4
  Top Layer w10: U4.6 5752.8,3862.8 v3(5760,3870)
  Bottom Layer w20: D7.1 v3(5760,3870)
NetC19_2: C19.2 D8.1 U5.6 | length 175.4
  Top Layer w10: U5.6 6302.8,3865.24 C19.2
  Bottom Layer w20: D8.1 v3(6310,3870)
NetC20_2: C20.2 D9.1 U6.6 | length 175.4
  Top Layer w10: U6.6 6852.8,3865.24 C20.2
  Bottom Layer w20: D9.1 v3(6860,3870)
NetC23_2: C23.2 R4.1 U2.1 | length 122.1
  Top Layer w10: C23.2@6442.28,3074.25 6480.33,3074.25 6504.46,3098.39 U2.1
NetC31_1: C31.1 C32.2 R22.2 | length 126.5
  Bottom Layer w10: C31.1 R22.2 6334.02,3021.73 6362.52,3021.73 C32.2
NetC32_1: C32.1 R16.1 R17.2 U2.3 | length 286.8
  Top Layer w10: R17.2 6376.07,3068.36 R16.1 6392.28,3040 6432.28,3000 6480,3000 6527.2,3047.2 U2.3
  other v3: 6440,3000
NetD1_A: D1.A R1.1 | length 70.3
  Top Layer w10: D1.A 5964.65,2270 R1.1
NetD6_2: D6.2 L1.1 Q7.3 R22.1 U2.5 | length 944.8
  Top Layer w10: L1.1 L1.1@6384,2990 ; v1(6450,2940) 6500,2990 6694.02,2990 U2.5
  Top Layer w60: L1.1 6346,2940 v1(6450,2940)
  Bottom Layer w10: R22.1 6350,2997.72 6350,2984.02 v3(6348.11,2982.13) 6348.11,2981.89 v3@6350,2980
  Bottom Layer w60: v1(6450,2940) 6520,2870 6600.49,2870 6600.49,2640.93 D6.2@6621.42,2620
NetQ1_2: Q1.1 R7.1 | length 126.6
  Top Layer w20: Q1.1 5620,3828.5 R7.1
NetQ2_2: Q2.1 R8.1 | length 126.6
  Top Layer w20: Q2.1 6170,3828.5 R8.1
NetQ3_2: Q3.1 R9.1 | length 126.6
  Top Layer w20: Q3.1 6720,3828.5 R9.1
NetQ4_2: Q4.1 R13.1 | length 87.6
  Bottom Layer w20: Q4.1 5666.06,3520 R13.1
NetQ4_3: Q4.2 R10.2 U7.1 | length 319.4
  Bottom Layer w10: R10.2 5607.64,3337.64 5691.61,3421.61 U7.1
NetQ5_2: Q5.1 R14.1 | length 87.6
  Bottom Layer w20: Q5.1 6216.06,3520 R14.1
NetQ5_3: Q5.2 R11.2 U8.1 | length 315.8
  Bottom Layer w10: R11.2 6151.49,3337.64 6241.61,3427.77 U8.1
NetQ6_2: Q6.1 R15.1 | length 87.6
  Bottom Layer w20: Q6.1 6766.06,3520 R15.1
NetQ6_3: Q6.2 R12.2 U9.1 | length 315.8
  Bottom Layer w10: R12.2 6701.49,3337.64 6789.09,3425.25 6789.09,3452.13 U9.1
NetQ7_1: Q7.2 U2.6 | length 397.8
  Top Layer w10: U2.6 6749.64,3047.2 6767.05,3029.8 6767.05,2997.05 6750,2980 6750,2780 v3(6740,2770)
  Bottom Layer w10: v3(6740,2770) 6785,2725 Q7.2
NetR2_2: R2.2 U1.44 | length 165.2
  Top Layer w10: R2.2@5530,2741.65 5530,2750 v2(5570,2790)
  Bottom Layer w10: v2(5570,2790) 5606.64,2790 5625.53,2808.9 U1.44
NetR3_2: R3.2 U1.45 | length 155.5
  Top Layer w10: R3.2@5580,2741.65 5600,2761.65 v2(5600,2820)
  Bottom Layer w10: v2@5597.17,2820 v2(5600,2820) 5608.58,2828.58 U1.45
NetR5_2: BOOT.1 R5.2 U1.60 | length 216.4
  Top Layer w10: BOOT.1 5828.9,2910.31 R5.2 5910.31,2880 v2(5940,2880)
  Bottom Layer w10: v2(5940,2880) 5948.9,2888.9 U1.60
NetR6_1: R6.1 R20.2 U1.24 | length 366.1
  Bottom Layer w10: R20.2 R6.1 5790,2320 5889.84,2419.84 U1.24
NetR18_2: R18.2 R19.2 U1.27 | length 568.3
  Bottom Layer w10: R19.2@5430,2420.31 R19.2 R18.2 5803.71,2380 5830.91,2407.2 5830.91,2432.8 5830.79,2432.92 U1.27
NetR21_2: R21.2 U2.2 | length 88
  Top Layer w10: R21.2@6480,3040 6490,3040 6522.8,3072.8 U2.2
NetU1_34: U1.34 U4.2 | length 2111.5
  Top Layer w10: v2(5240,2530) 5188.19,2581.81 5188.19,3584.82 5203.36,3600 5224.82,3600 5233.01,3591.81 5700.78,3591.81 5727.2,3618.23 U4.2
  Bottom Layer w10: v2(5240,2530) 5264.09,2554.09 5505.93,2554.09 5563.88,2612.05 U1.34
NetU1_35: U1.35 U5.2 | length 2556.6
  Top Layer w10: v2(5240,2570) 5204.09,2605.91 5204.09,3524.09 5220,3540 5838.99,3540 5839.9,3539.09 6209.09,3539.09 6254.09,3584.09 6254.09,3594.87 6275.13,3615.91 6277.2,3615.91 U5.2
  Bottom Layer w10: v2(5240,2570) 5499.34,2570 5561.07,2631.73 U1.35
NetU1_36: U1.36 U6.2 | length 3020.7
  Top Layer w10: v2@5240,2608.19 5234.09,2614.09 5230,2610 5230,3471.8 5256.82,3498.62 6707.6,3498.62 6827.2,3618.23 U6.2
  Bottom Layer w10: v2@5240,2608.19 v2@5241.81,2608.19 ; v2(5240,2610) v2@5241.81,2608.19 ; v2@5248.19,2608.19 v2@5241.81,2608.19 ; U1.36 5558.26,2651.42 5492.75,2585.91 5264.09,2585.91 v2@5241.81,2608.19
NetU1_41: U1.41 U4.1 | length 2033.2
  Top Layer w10: v2(5200,3630) 5217.32,3630 5239.6,3607.72 5672.01,3607.72 U4.1
  Bottom Layer w10: v2(5200,3630) 5188.19,3618.19 5188.19,2701.81 5288.19,2601.81 5486.16,2601.81 5634.19,2749.84 U1.41
NetU1_42: U1.42 U5.1 | length 2527.4
  Top Layer w10: v2@5215.91,3575.91 v2@5220,3571.81 ; U5.1 6169.29,3555 5846.49,3555 5845.58,3555.91 5283.22,3555.91 5267.32,3571.81 v2@5220,3571.81 ; v2@5220,3571.81 5211.81,3571.81 5213.62,3570 v2(5218.19,3570) v2@5220,3571.81
  Bottom Layer w10: v2(5218.19,3570) 5210,3570 5204.09,3564.09 5204.09,2708.4 5294.78,2617.72 5479.57,2617.72 5631.38,2769.53 U1.42
NetU1_43: U1.43 U6.1 | length 2951.1
  Top Layer w10: v2(5230,3510) 5240,3520 6684.29,3520 U6.1
  Bottom Layer w10: v2@5221.81,3500 5221.81,2713.18 5301.37,2633.62 5472.98,2633.62 5628.58,2789.21 U1.43 ; v2(5230,3510) v2@5231.81,3510
QUAD_A: ENCODER.3 U1.37 | length 657.8
  Top Layer w10: v2(5720,2660) 5723.36,2660 5749.27,2685.91 5863.22,2685.91 5891.81,2657.32 5891.81,2598.19 6030,2460 6091.89,2460 ENCODER.3
  Bottom Layer w10: U1.37 5708.9,2671.1 v2(5720,2660)
QUAD_B: ENCODER.2 U1.38 | length 586.4
  Top Layer w10: v2(5760,2660) 5765.91,2665.91 5860.73,2665.91 5875.91,2650.73 5875.91,2591.6 6023.41,2444.09 6055.91,2444.09 6073.15,2426.85 ENCODER.2
  Bottom Layer w10: U1.38 5729.21,2690.79 v2(5760,2660)
SA: C18.1 Q1.2 Q4.8 U4.8 | length 413.9
  Top Layer w10: Q1.2@5420,3716.06 5573.94,3870 C18.1 5702.44,3803.5 U4.8
  other v1: 5340,3740 5410,3740 5480,3740 5550,3740 5340,3810 5410,3810 5480,3810 5550,3810 5340,3880 5410,3880 5480,3880 5550,3880
SB: C19.1 Q2.2 Q5.8 U5.8 | length 631.6
  Top Layer w10: U5.8 6252.44,3803.5 C19.1 6123.94,3870 ; 6123.94,3870 5970,3716.06 6123.94,3870
  other v1: 5890,3740 5960,3740 6030,3740 6100,3740 5890,3810 5960,3810 6030,3810 6100,3810 5890,3880 5960,3880 6030,3880 6100,3880
SC: C20.1 Q3.2 Q6.8 U6.8 | length 631.6
  Top Layer w10: U6.8 6801.61,3869.17 C20.1 6673.94,3870 ; 6673.94,3870 6520,3716.06 6673.94,3870
  other v1: 6440,3740 6510,3740 6580,3740 6650,3740 6440,3810 6510,3810 6580,3810 6650,3810 6440,3880 6510,3880 6580,3880 6650,3880
SER_RX: COMM.3 R25.1 U1.59 | length 1313.4
  Top Layer w10: v2(5910,2850) 5931.81,2828.19 5931.81,2728.19 5990,2670 6032.49,2670 6242.49,2460 6669.37,2460 COMM.3
  Bottom Layer w10: v2(5910,2850) 5910,2886.64 5929.21,2905.85 U1.59 ; R25.1 6760.63,2350 COMM.3
SER_TX: COMM.2 R24.1 U1.58 | length 1380.6
  Top Layer w10: v2(5870,2850) 5915.91,2804.09 5915.91,2721.6 5983.41,2654.09 6025.91,2654.09 6235.91,2444.09 6606.54,2444.09 COMM.2
  Bottom Layer w10: v2(5870,2850) 5870,2880.43 5909.53,2919.96 U1.58 ; R24.1 6698.35,2280.63 COMM.2
USB_DM: JP3.D- R2.1 | length 550.7
  Top Layer w10: R2.1@5530,2698.35 5519.23,2687.58 5519.23,2388.27 5553.41,2354.09 5643.41,2354.09 5664.41,2333.1 JP3.D-
USB_DP: JP3.D+ R3.1 | length 568.8
  Top Layer w10: R3.1@5580,2698.35 5535.14,2653.48 5535.14,2394.86 5560,2370 5650,2370 5690,2330 JP3.D+
USB_PWR: JP3.VBUS R6.2 | length 93.7
  Top Layer w10: v2(5632.5,2313.68) 5638.82,2307.36 JP3.VBUS
  Bottom Layer w10: v2(5632.5,2313.68) 5638.82,2320 R6.2
VCC: BOOT.4 C1.2 C2.2 C3.2 C4.2 C5.2 C6.2 C9.1 C15.2 C21.1 C22.1 C30.1 C36.2 COMM.4 D2.1 ENCODER.8 R1.2 R24.2 R25.2 U1.1 U1.13 U1.19 U1.32 U1.48 U1.64 U3.2 U3.4 U7.6 U7.7 U8.6 U8.7 U9.6 U9.7 U10.3 | length 7143.8
  Top Layer w10: BOOT.4 5667.8,2990 v2(5700,2990) ; R1.2 6087.72,2290 v2(6170,2290)
  Bottom Layer w10: v3(5590,2560) 5590,2570 5590.45,2570.45 5750.45,2570.45 ; C3.2@5655.6,2914.25 C3.2@5660,2914.25 ; U1.48 5660,2890.12 C3.2@5660,2914.25 ; C9.1 5715.75,3283.9 U7.7 U7.6 5742.8,3260.36 5770.2,3232.95 6165.45,3232.95 6205.91,3273.41 6205.91,3310.23 6223.43,3327.76 6249.8,3327.76 6267.2,3310.35 U8.7 ; C4.2 5732.36,2441.89 U1.32 5732.36,2552.36 5750.45,2570.45 ; C36.2 5829.25,2265 U10.3 5898.7,2290 v2(6170,2290) 6435.59,2290 ENCODER.8 ; U1.19 v2@5988.27,2570.45 ; U1.64 6027.64,2992.36 6010,3010 5720,3010 v2(5700,2990) 5700,2940 5680,2920 5665.75,2920 C3.2@5660,2914.25 ; U1.64@6030.91,2954.25 C2.2 6097.52,2936.73 6097.52,2931.77 ; C1.2 6097.52,2931.77 ; C21.1 6265.75,3283.9 U8.7 ; U3.2 U3.4 6373.86,2560 6834.56,2560 6848.62,2574.07 6848.62,3279.53 U9.6 U9.7 ; R24.2 R25.2 6612.28,2400 ; COMM.4 6731.63,2400 6612.28,2400 ; C22.1@6817.2,3221.46 C22.1 6815.75,3283.9 U9.7 ; 5750.45,2570.45 v2@5988.27,2570.45 ; v2@5988.27,2570.45 v2@5990,2572.19 ; v2@5990,2572.19 v2(5990,2580) v2@5997.81,2580 ; v2@5990,2572.19 v2@5997.81,2580 ; v2@5997.81,2580 6060,2580 6148.19,2491.81 6453.78,2491.81 ENCODER.8 ; v2@5997.81,2580 6069.23,2651.42 U1.13 6160,2651.42 C6.2 6238.11,2654.25 6243.86,2660 6214.25,2689.61 6214.25,2894.65 C30.1 6207.24,2887.64 U1.1 6097.52,2931.77 ; U8.7 U8.6 6292.8,3260.36 6318.85,3234.3 6709.29,3234.3 6761.81,3286.82 6761.81,3316.82 6774.99,3330 6797.56,3330 6817.2,3310.35 U9.7 ; ENCODER.8 6612.28,2400
VDD: C11.2 C12.2 C23.1 C24.2 C25.2 C26.2 C27.2 C28.2 C29.2 Q1.8 Q2.8 Q3.8 Q7.1 R4.2 R18.1 R21.1 U2.8 | length 1845.3
  Top Layer w10: 5307.01,2380 v2(5380,2380) ; R21.1@6444.57,3040 R21.1 6436.71,3040 6417.22,3059.5 6417.22,3089.01 6433.96,3105.75 6476.39,3105.75 6570,3199.36 Q3.8 ; U2.8 6796.89,3098.39 6800,3101.5 v1(6800,3110) v1@6800,3132.44
  Top Layer w60: C25.2 C26.2 5307.01,2380 C27.2 C28.2 5307.01,2857.01 ; Q3.8@6570,3182.99 Q3.8@6570,3197.4 ; Q3.8 6595.51,3314.49 v1(6800,3110)
  Bottom Layer w60: Q7.1@6800,2775 v1(6800,2830) v1(6800,2900) C12.2@6800,2962.99 ; C12.2@6800,2977.01 v1(6800,3110)
pads on no net: BOOT.2 BOOT.3 D2.2 JP3.ID RESET.2 U1.2 U1.3 U1.4 U1.8 U1.9 U1.10 U1.11 U1.17 U1.25 U1.29 U1.30 U1.33 U1.39 U1.40 U1.46 U1.49 U1.50 U1.51 U1.52 U1.53 U1.54 U1.55 U1.56 U1.57 U4.5 U5.5 U6.5 U7.4 U8.4 U9.4 U10.5 U10.8

## Polygon pours and split planes (outlines as drawn)
GND on Top Layer "GND_L01_P004" (solid, remove dead copper, pour order 4): 5010,1770 5000,1780 5000,4240 7110,4240 7110,1770
GND on Bottom Layer "GND_L02_P008" (solid, remove dead copper, pour order 8): 4990,1740 4980,1750 4980,4210 7090,4210 7090,1740

## Keep-outs
Keep-Out Layer:
  lines w10: 5160,1970 5160,3940 5160,4010 5260,4110 6790,4110 6930,3970 6930,1970 6880,1920 6720,1920 6670,1970 6670,2020 6640,2050 5450,2050 5420,2020 5420,1970 5370,1920 5210,1920 5160,1970

## Other copper
Top Layer:
  region net SC: 6390,3630 6690,3630 6690,4010 ccw(c6630,4010) 6630,4070 6450,4070 ccw(c6450,4010) 6390,4010
  region net SB: 5840,3630 6140,3630 6140,4010 ccw(c6080,4010) 6080,4070 5900,4070 ccw(c5900,4010) 5840,4010
  region net VDD: 5300,2800 5480,2800 ccw(c5478.57,2865.91) 5544.48,2864.48 cw(c5991.09,2854.79) 5656.82,3151.13 cw(c5697.11,3117.78) 5700,3170 6780,3170 6780,3460 5310,3460 ccw(c5310,3395) 5245,3395 5245,2855 ccw(c5300,2855)
  region net SA: 5290,3630 5590,3630 5590,4010 ccw(c5530,4010) 5530,4070 5350,4070 ccw(c5350,4010) 5290,4010
Bottom Layer:
  rectangle net NetQ6_3: 6390,3290 6690,3560
  rectangle net NetQ5_3: 5840,3290 6140,3560
  rectangle net NetQ4_3: 5290,3290 5590,3560
  pour cut-out: 6542.92,3157.08 ccw(c6550,3150) 6557.08,3142.92 6614.15,3199.99 6716.26,3199.99 ccw(c6716.26,3210) 6723.34,3202.92 6798.7,3278.27 ccw(c6791.61,3285.35) 6801.63,3285.35 ccw(c6791.61,3285.35) 6784.53,3292.44 6712.11,3220.01 6610,3220.01 ccw(c6610,3210) 6602.92,3217.08
  pour cut-out: 5432.92,3149.44 ccw(c5440,3142.36) 5447.08,3135.28 5511.79,3199.99 5616.26,3199.99 ccw(c5616.26,3210) 5623.34,3202.92 5692.04,3271.62 ccw(c5684.96,3278.7) 5694.98,3278.7 ccw(c5684.96,3278.7) 5677.88,3285.78 5612.11,3220.01 5507.64,3220.01 ccw(c5507.64,3210) 5500.56,3217.08
  pour cut-out: 5982.92,3149.44 ccw(c5990,3142.36) 5997.08,3135.28 6061.79,3199.99 6166.26,3199.99 ccw(c6166.26,3210) 6173.34,3202.92 6248.7,3278.27 ccw(c6241.61,3285.35) 6251.63,3285.35 ccw(c6241.61,3285.35) 6234.53,3292.44 6162.11,3220.01 6057.64,3220.01 ccw(c6057.64,3210) 6050.56,3217.08
  region net GND: 6727.13,3097.13 6727.13,3133.18 ccw(c6667.13,3133.19) 6667.13,3193.18 5327.13,3193.18 ccw(c5327.12,3103.2) 5237.13,3103.19 5237.13,2753.68 ccw(c5305.52,2753.67) 5305.52,2685.28 5460.52,2685.28 ccw(c5469.84,2752.59) 5537.13,2743.18 5537.13,2790.28 cw(c5889.82,2771.61) 5660.24,3040 6200,3040 6670,3040 ccw(c6670,3097.13)

## Silkscreen, mask and mechanical layers (free items; w line width, h text height)
Bottom Overlay:
  text "ESC v3.0 - Raphael Chang" at 6380,2080 h30